# Altium PCB CoreV1.1_test.PcbDoc (part 6 of 14)
Units mil, origin at the board's own origin, x right, y up, seen from the top; angles counter-clockwise.
Board outline 2860 x 2420 mil, 6 copper layers (Top Layer, GND, SIGNAL_1, SIGNAL_2, POWER, Bottom Layer); 110 components, 241 nets, 882 pads, 697 vias.
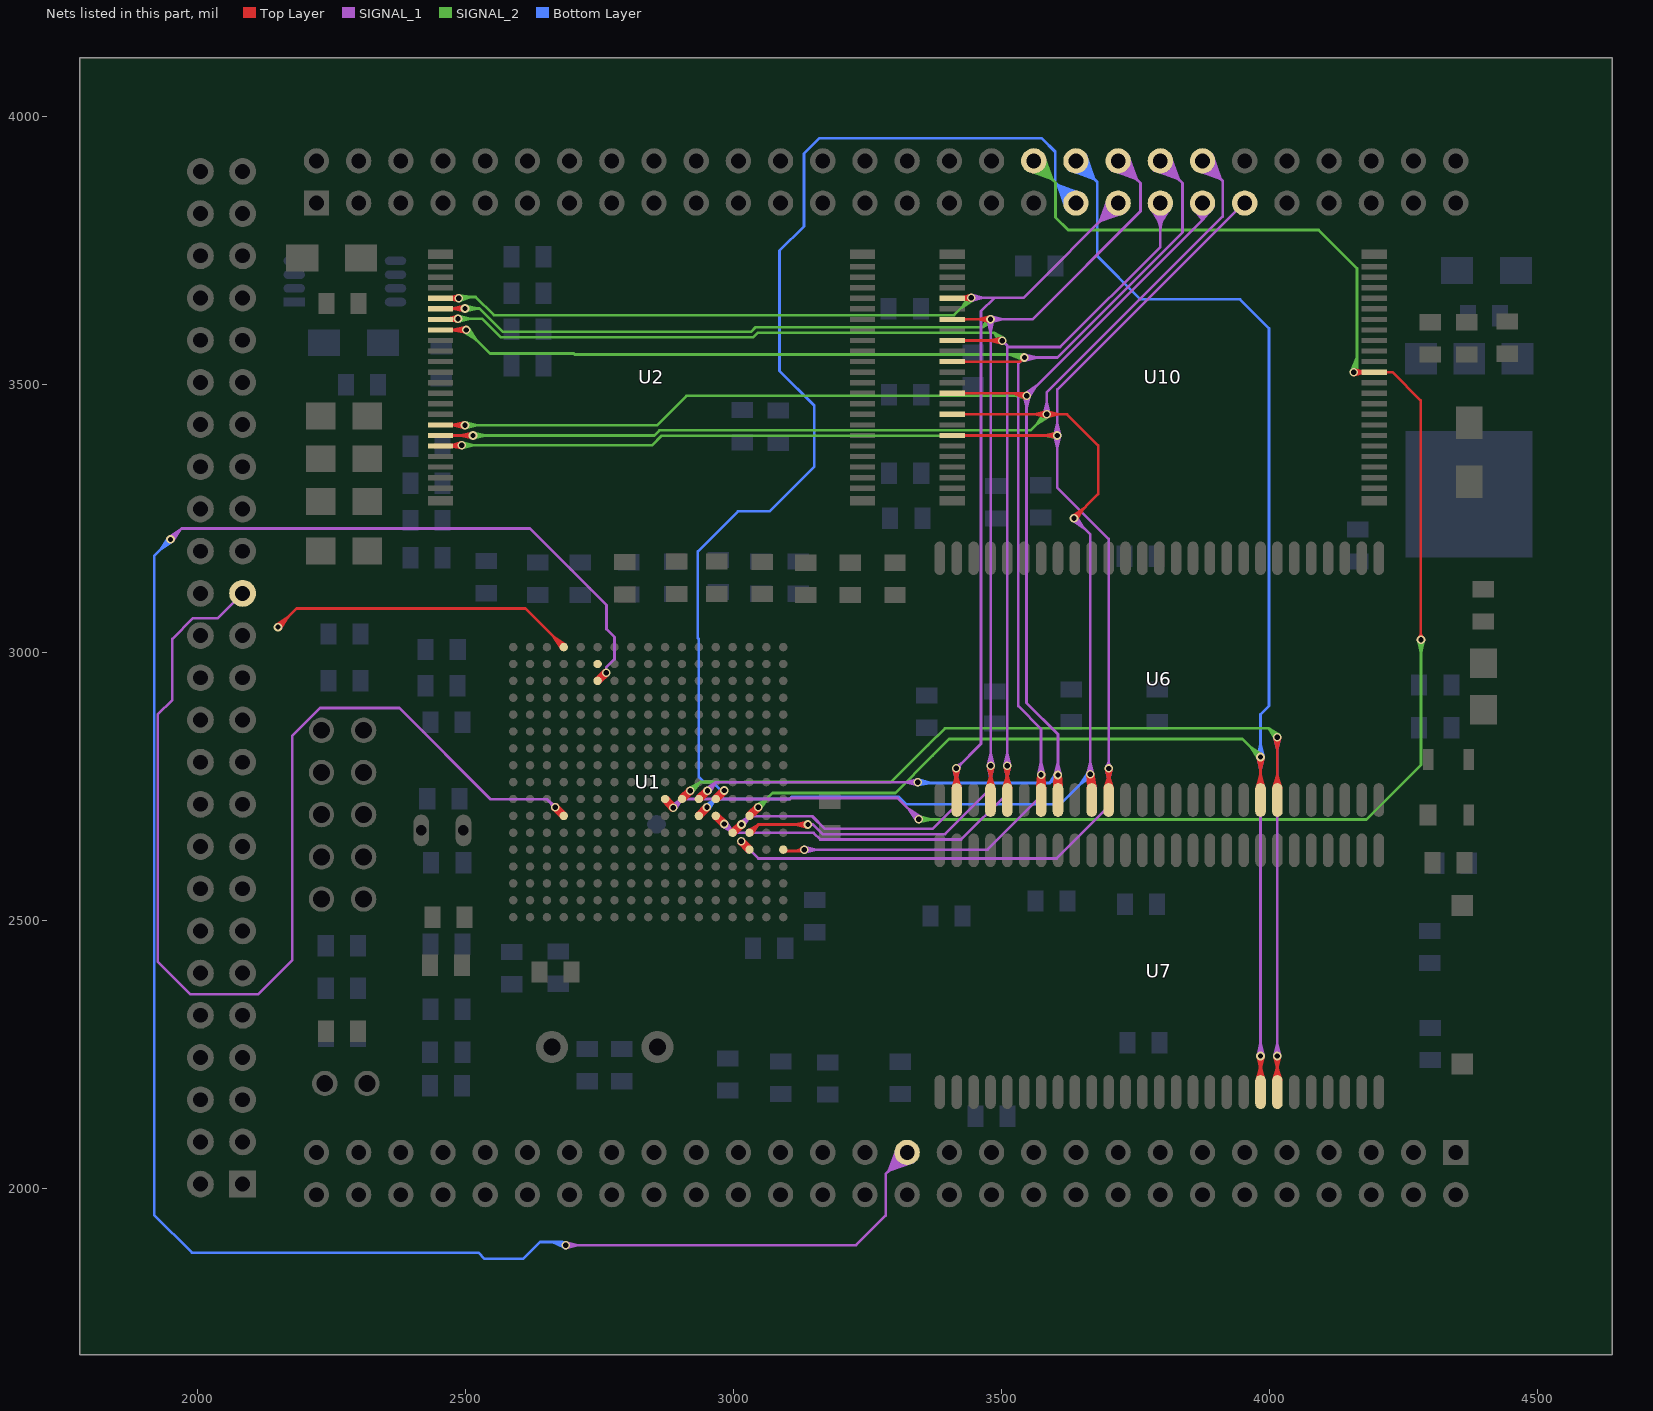
[diagram p10: the nets of this part, all layers, seen from the top]

## Via types
v1: diameter 16, hole 10, Top Layer to Bottom Layer, tented both sides, 637 vias
v2: diameter 30, hole 18, Top Layer to Bottom Layer, tented both sides, 56 vias
v3: diameter 16, hole 10, Top Layer to Bottom Layer, 2 vias
v4: diameter 30, hole 16, Top Layer to Bottom Layer, tented both sides, 1 vias
v5: diameter 16/16/16/16 (per signal layer), hole 10, Top Layer to Bottom Layer, tented both sides, 1 vias

## Nets (pads, with @x,y where several pads share a name; then routed paths per layer and width w, separated by ;. In a path a pad name is that pad's centre, name@x,y a point inside that pad or via, vN(x,y) a via of type N, cw(c..) or ccw(c..) an arc to the next point about the centre after c; other vN are vias at no path point) (continued)
LADDR22: pad.PC36 U1.H10 U10.13 | length 4683
  Top Layer w5: U1.H10@2872.38,2721.26 cw(c2872.38,2708.29) 2881.56,2717.46 cw(c2890.73,2726.64) U1.H10@2877.76,2726.64 ; U1.H10@2877.39,2721.63 cw(c2866.26,2710.5) v1@2882,2710.5 ; 2879.85,2719.17 ccw(c2887.5,2726.82) v1@2887.5,2716 ; v1@2882.41,2708.43 U1.H10@2876.63,2729.93 ; v1@2883.05,2707.27 U1.H10@2872.38,2726.64 ; v1@2883.96,2706.29 U1.H10@2869.09,2722.39 ; v1@2889.88,2715.46 U1.H10@2869.09,2722.39 ; v1@2891.02,2714.73 U1.H10@2872.38,2726.64 ; v1@2891.93,2713.76 U1.H10@2876.63,2729.93 ; v1@4158.45,3517.75 4180.79,3523.21 v1@4158.45,3528.67 ; v1@4158.57,3517.76 U10.13@4177.13,3523.21 ; v1@4158.57,3528.65 U10.13@4177.13,3523.21 ; v1@4161.68,3519.32 cw(c4171.07,3509.93) 4171.07,3523.21 cw(c4171.07,3536.49) v1@4161.68,3527.1 ; U10.13@4175.41,3521.5 ccw(c4171.28,3517.36) 4171.28,3523.21 ccw(c4171.28,3529.05) U10.13@4175.41,3524.92 ; U10.13@4214.53,3523.21 4229.79,3523.21 ; U10.13@4216.24,3521.5 cw(c4220.37,3517.36) 4220.37,3523.21 cw(c4220.37,3529.05) U10.13@4216.24,3524.92 ; v1@4279.11,3027.39 ccw(c4270.93,3035.57) 4282.5,3035.57 ; 4282.5,3037.99 ccw(c4297.49,3037.99) v1@4286.89,3027.39 ; v1(4283,3023.5) 4282.5,3024 4282.5,3470.5 4229.79,3523.21 ; U1.H10@2869.09,2722.39 v1@2887.5,2711.52 ; U1.H10@2869.09,2722.39 v1(2887.5,2710.5) ; U1.H10@2872.38,2726.64 v1@2887.5,2711.52 ; U1.H10@2872.38,2726.64 v1(2887.5,2710.5) ; U1.H10@2876.63,2729.93 v1@2887.5,2711.52 ; U1.H10@2876.63,2729.93 v1(2887.5,2710.5) ; U10.13@4177.13,3523.21 v1(4157.79,3523.21) U10.13@4195.83,3523.21 4229.79,3523.21
  SIGNAL_1 w5: v1@2884.11,2714.83 2903.5,2726.5 ; v1(2887.5,2710.5) 2903.5,2726.5 ; v1@2887.5,2716 ccw(c2887.5,2729.28) 2896.89,2719.89 ccw(c2906.28,2710.5) v1@2893,2710.5 ; v1@2891.83,2707.11 2903.5,2726.5 ; v1@3340.5,2689 ccw(c3327.22,2689) 3336.61,2698.39 ccw(c3346,2707.78) v1@3346,2694.5 ; v1@3341.73,2685.54 3327.39,2707.61 v1@3349.46,2693.27 ; v1(3346,2689) 3306.5,2728.5 3107.08,2728.5 3105.08,2726.5 2903.5,2726.5
  SIGNAL_2 w5: v1@3346.54,2683.53 3369.02,2688.5 ; v1@3346.78,2694.45 3369.02,2688.5 ; v1@3349.89,2685.11 cw(c3358.07,2676.93) 3358.07,2688.5 ; v1@3349.89,2692.89 ccw(c3360.49,2703.49) 3360.49,2688.5 ; pad.PC36@3549.06,3899.61 3594.61,3883.22 ; pad.PC36@3551.04,3904.31 3594.61,3883.22 ; pad.PC36@3553.47,3908.73 3594.61,3883.22 ; pad.PC36@3556.33,3912.85 3594.61,3883.22 ; pad.PC36@3560.38,3896.33 cw(c3560.38,3845.33) 3596.44,3881.39 cw(c3632.49,3917.45) pad.PC36@3581.5,3917.45 ; pad.PC36@3560.38,3901.33 cw(c3560.38,3862.4) 3587.9,3889.93 cw(c3615.42,3917.45) pad.PC36@3576.5,3917.45 ; pad.PC36@3560.38,3906.33 cw(c3560.38,3879.48) 3579.36,3898.46 cw(c3598.35,3917.45) pad.PC36@3571.5,3917.45 ; pad.PC36@3560.38,3917.45 3601,3876.83 3601,3812.23 3624.73,3788.5 4092,3788.5 4163.5,3717 4163.5,3528.92 v1(4157.79,3523.21) 4163.5,3549.85 ; pad.PC36@3564.97,3921.49 3594.61,3883.22 ; pad.PC36@3569.09,3924.36 3594.61,3883.22 ; pad.PC36@3573.52,3926.79 3594.61,3883.22 ; pad.PC36@3578.21,3928.77 3594.61,3883.22 ; v1@4152.56,3524.9 4163.5,3549.85 ; v1@4153.9,3527.1 ccw(c4130.73,3550.27) 4163.5,3550.27 ; v1@4157.44,3523.56 ccw(c4142.8,3538.2) 4163.5,3538.2 ; v1@4163.26,3522.6 4163.5,3549.85 ; v1@4277.54,3022.84 4283,3000.5 v1@4288.46,3022.84 ; v1@4279.11,3019.61 cw(c4269.72,3010.22) 4283,3010.22 cw(c4296.28,3010.22) v1@4286.89,3019.61 ; v1(4283,3023.5) 4283,2790.5 4181,2688.5 3346.5,2688.5 v1(3346,2689) 3369.02,2688.5
LADDR23: pad.PC37 U1.E10 | length 2926.5
  Top Layer w5: U1.E10@2966.87,2732.01 ccw(c2966.87,2744.99) 2976.04,2735.81 ccw(c2985.22,2726.64) U1.E10@2972.24,2726.64 ; 2973.15,2732.92 cw(c2983,2723.07) v1@2983,2737 ; 2973.8,2733.57 ccw(c2964.87,2742.5) v1@2977.5,2742.5 ; v1@2978.01,2744.81 U1.E10@2971.1,2723.32 ; v1@2978.7,2745.92 U1.E10@2966.87,2726.64 ; v1@2979.62,2746.84 U1.E10@2963.55,2730.87 ; v1@2985.23,2737.47 U1.E10@2963.55,2730.87 ; v1@2986.35,2738.14 U1.E10@2966.87,2726.64 ; v1@2987.29,2739.05 U1.E10@2971.1,2723.32 ; U1.E10@2963.55,2730.87 v1@2982.73,2742.5 ; U1.E10@2963.55,2730.87 v1(2983,2742.5) ; U1.E10@2966.87,2726.64 v1@2982.73,2742.5 ; U1.E10@2966.87,2726.64 v1(2983,2742.5) ; U1.E10@2971.1,2723.32 v1@2982.73,2742.5 ; U1.E10@2971.1,2723.32 v1(2983,2742.5)
  Bottom Layer w5: v1(2983,2742.5) 2976.5,2742.5 2960.74,2758.26 2944.58,2758.26 2935.5,2767.34 2935.5,2830.58 2935.25,2830.83 2935.25,3025.01 2933.5,3026.76 2933.5,3188.5 3008.5,3263.5 3067,3263.5 3151,3347.5 3151,3460.5 3086,3525.5 3086,3749.86 3131.5,3795.36 3131.5,3931 3160,3959.5 3575.5,3959.5 3600.5,3934.5 3600.5,3877.33 pad.PC37@3639.12,3838.71 3604.89,3872.94 ; pad.PC37@3618,3838.71 ccw(c3567,3838.71) 3603.06,3874.77 ccw(c3639.12,3910.82) pad.PC37@3639.12,3859.83 ; pad.PC37@3621.28,3827.39 3604.89,3872.94 ; pad.PC37@3623,3838.71 ccw(c3584.07,3838.71) 3611.6,3866.23 ccw(c3639.12,3893.75) pad.PC37@3639.12,3854.83 ; pad.PC37@3625.98,3829.37 3604.89,3872.94 ; pad.PC37@3628,3838.71 ccw(c3601.15,3838.71) 3620.13,3857.69 ccw(c3639.12,3876.68) pad.PC37@3639.12,3849.83 ; pad.PC37@3630.4,3831.8 3604.89,3872.94 ; pad.PC37@3634.52,3834.66 3604.89,3872.94 ; pad.PC37@3643.16,3843.3 3604.89,3872.94 ; pad.PC37@3646.03,3847.42 3604.89,3872.94 ; pad.PC37@3648.46,3851.85 3604.89,3872.94 ; pad.PC37@3650.44,3856.54 3604.89,3872.94
LADDR24: pad.PC38 U1.C11 U6.20 U7.20 | length 4786.6
  Top Layer w5: U1.C11@3029.86,2700.52 ccw(c3029.86,2713.49) 3039.04,2704.32 ccw(c3048.21,2695.14) U1.C11@3035.24,2695.14 ; U1.C11@3030.14,2695.14 U1.C11@3029.86,2695.14 ; 3036.13,2701.41 cw(c3046,2691.55) v1@3046,2705.5 ; 3036.81,2702.09 ccw(c3027.9,2711) v1@3040.5,2711 ; v1@3041.01,2713.31 U1.C11@3034.09,2691.82 ; v1@3041.7,2714.43 U1.C11@3029.86,2695.14 ; v1@3042.63,2715.34 U1.C11@3026.54,2699.37 ; v1@3048.23,2705.97 U1.C11@3026.54,2699.37 ; v1@3049.35,2706.64 U1.C11@3029.86,2695.14 ; v1@3050.28,2707.55 U1.C11@3034.09,2691.82 ; U7.20@3976.29,2202.47 3983.55,2226.23 ; U6.20@3976.29,2747.47 3983.55,2771.23 ; v1@3978.09,2246.34 3983.55,2224 v1@3989.01,2246.34 ; v1@3978.09,2804.34 3983.55,2782 v1@3989.01,2804.34 ; U7.20@3978.36,2206.58 ccw(c3965.83,2219.11) 3983.55,2219.11 ccw(c4001.28,2219.11) U7.20@3988.74,2206.58 ; U6.20@3978.36,2751.58 ccw(c3965.83,2764.11) 3983.55,2764.11 ccw(c4001.28,2764.11) U6.20@3988.74,2751.58 ; v1@3979.66,2243.11 cw(c3970.27,2233.72) 3983.55,2233.72 cw(c3996.83,2233.72) v1@3987.44,2243.11 ; v1@3979.66,2801.11 cw(c3970.27,2791.72) 3983.55,2791.72 cw(c3996.83,2791.72) v1@3987.44,2801.11 ; U7.20@3983.55,2179.73 v1(3983.55,2247) ; U7.20@3983.55,2201.39 3983.55,2226.23 ; U6.20@3983.55,2724.73 v1(3983.55,2805) ; U6.20@3983.55,2746.39 3983.55,2771.23 ; U7.20@3990.81,2202.47 3983.55,2226.23 ; U6.20@3990.81,2747.47 3983.55,2771.23 ; U1.C11@3026.54,2699.37 v1@3045.72,2711 ; U1.C11@3026.54,2699.37 v1(3046,2711) ; U1.C11@3029.86,2695.14 v1@3045.72,2711 ; U1.C11@3029.86,2695.14 v1(3046,2711) ; U1.C11@3034.09,2691.82 v1@3045.72,2711 ; U1.C11@3034.09,2691.82 v1(3046,2711)
  SIGNAL_1 w5: v1@3978.09,2247.65 3983.5,2270 ; v1@3978.09,2804.35 3983.5,2782 ; v1@3979.66,2250.89 ccw(c3970.4,2260.15) 3983.5,2260.15 ; v1@3979.66,2801.11 cw(c3970.4,2791.85) 3983.5,2791.85 ; v1@3983.5,2247.05 v1@3983.5,2805 ; 3983.5,2260.4 ccw(c3996.96,2260.4) v1@3987.44,2250.89 ; 3983.5,2791.6 cw(c3996.96,2791.6) v1@3987.44,2801.11 ; v1(3983.55,2247) 3983.5,2270 ; v1(3983.55,2805) 3983.5,2782 ; v1@3989.01,2247.67 3983.5,2270 ; v1@3989.01,2804.33 3983.5,2782
  SIGNAL_2 w5: v1@3042.56,2715.29 3064.68,2729.47 ; v1@3046,2716.5 ccw(c3046,2730.3) 3055.76,2720.54 ; v1@3050.25,2707.51 3064.68,2729.47 ; v1@3051.5,2711 cw(c3064.26,2711) 3055.24,2720.02 ; 3371.58,2807.5 3302.08,2738 3073.22,2738 3046.22,2711 v1(3046,2711) 3064.68,2729.47 ; 3371.64,2807.5 3402.64,2838.5 3950.05,2838.5 v1(3983.55,2805) 3964.95,2823.61 ; v1@3978.05,2805 ccw(c3964.77,2805) 3974.16,2814.39 ccw(c3983.55,2823.78) v1@3983.55,2810.5 ; v1@3979.28,2801.54 3964.95,2823.61 ; v1@3987.01,2809.27 3964.95,2823.61
  Bottom Layer w5: pad.PC38@3627.8,3899.61 3673.35,3883.22 ; pad.PC38@3629.78,3904.31 3673.35,3883.22 ; pad.PC38@3632.21,3908.73 3673.35,3883.22 ; pad.PC38@3635.07,3912.85 3673.35,3883.22 ; pad.PC38@3639.12,3896.33 cw(c3639.12,3845.33) 3675.18,3881.39 cw(c3711.23,3917.45) pad.PC38@3660.24,3917.45 ; pad.PC38@3639.12,3901.33 cw(c3639.12,3862.4) 3666.64,3889.93 cw(c3694.16,3917.45) pad.PC38@3655.24,3917.45 ; pad.PC38@3639.12,3906.33 cw(c3639.12,3879.48) 3658.1,3898.46 cw(c3677.09,3917.45) pad.PC38@3650.24,3917.45 ; pad.PC38@3639.12,3917.45 3679,3877.57 3679,3739.5 3759.48,3659.02 3945.48,3659.02 3999.5,3605 3999.5,2900.56 3983.5,2884.56 3983.5,2847 ; pad.PC38@3643.71,3921.49 3673.35,3883.22 ; pad.PC38@3647.83,3924.36 3673.35,3883.22 ; pad.PC38@3652.26,3926.79 3673.35,3883.22 ; pad.PC38@3656.95,3928.77 3673.35,3883.22 ; v1@3978.09,2805.65 3983.5,2828 ; v1@3979.66,2808.89 ccw(c3970.4,2818.15) 3983.5,2818.15 ; 3983.5,2818.4 ccw(c3996.96,2818.4) v1@3987.44,2808.89 ; 3983.5,2838 3983.5,2847 ; v1@3989.01,2805.67 3983.5,2828 ; 3983.5,2828 v1(3983.55,2805) 3983.5,2805.05 3983.5,2847
LADDR25: U1.G10 U6.21 U7.21 | length 2891.1
  Top Layer w5: U1.G10@2903.88,2732.01 ccw(c2903.88,2744.99) 2913.05,2735.81 ccw(c2922.23,2726.64) U1.G10@2909.25,2726.64 ; v1@2913.74,2742 cw(c2900.46,2742) 2909.85,2732.61 cw(c2919.24,2723.22) v1@2919.24,2736.5 ; v1@2914.2,2744.19 U1.G10@2908.12,2723.34 ; v1@2914.89,2745.37 U1.G10@2903.88,2726.64 ; v1@2915.85,2746.33 U1.G10@2900.58,2730.88 ; v1@2921.43,2736.96 U1.G10@2900.58,2730.88 ; v1@2922.61,2737.65 U1.G10@2903.88,2726.64 ; v1@2923.57,2738.61 U1.G10@2908.12,2723.34 ; U7.21@4007.79,2202.47 4015.05,2226.23 ; U6.21@4007.79,2747.47 4015.05,2771.23 ; v1@4009.59,2246.34 4015.05,2224 v1@4020.51,2246.34 ; v1@4009.59,2841.34 4015.05,2819 v1@4020.51,2841.34 ; U7.21@4009.86,2206.58 ccw(c3997.32,2219.11) 4015.05,2219.11 ccw(c4032.77,2219.11) U7.21@4020.24,2206.58 ; U6.21@4009.86,2751.58 ccw(c3997.32,2764.11) 4015.05,2764.11 ccw(c4032.77,2764.11) U6.21@4020.24,2751.58 ; v1@4011.16,2243.11 cw(c4001.77,2233.72) 4015.05,2233.72 cw(c4028.33,2233.72) v1@4018.94,2243.11 ; v1@4011.16,2838.11 cw(c4001.77,2828.72) 4015.05,2828.72 cw(c4028.33,2828.72) v1@4018.94,2838.11 ; U7.21@4015.05,2179.73 v1(4015.05,2247) ; U7.21@4015.05,2201.39 4015.05,2226.23 ; U6.21@4015.05,2724.73 v1(4015.05,2842) ; U6.21@4015.05,2746.39 4015.05,2771.23 ; U7.21@4022.31,2202.47 4015.05,2226.23 ; U6.21@4022.31,2747.47 4015.05,2771.23 ; U1.G10@2900.58,2730.88 v1(2919.24,2742) ; U1.G10@2900.58,2730.88 v1(2919.24,2742) ; U1.G10@2903.88,2726.64 v1(2919.24,2742) ; U1.G10@2903.88,2726.64 v1(2919.24,2742) ; U1.G10@2908.12,2723.34 v1(2919.24,2742) ; U1.G10@2908.12,2723.34 v1(2919.24,2742)
  SIGNAL_1 w5: v1@4009.59,2247.66 4015.05,2270 v1@4020.51,2247.66 ; v1@4009.59,2841.34 4015.05,2819 v1@4020.51,2841.34 ; v1@4011.16,2250.89 ccw(c4001.77,2260.28) 4015.05,2260.28 ccw(c4028.33,2260.28) v1@4018.94,2250.89 ; v1@4011.16,2838.11 cw(c4001.77,2828.72) 4015.05,2828.72 cw(c4028.33,2828.72) v1@4018.94,2838.11 ; v1(4015.05,2247) v1(4015.05,2842)
  SIGNAL_2 w5: v1@2916.12,2746.53 2938,2758.26 ; v1@2919.24,2747.5 ccw(c2919.24,2766.8) 2932.89,2753.15 ; v1@2923.28,2738.27 2938,2758.26 ; v1@2924.74,2742 cw(c2931.99,2742) 2926.86,2747.13 ; v1@4009.55,2842 ccw(c3996.27,2842) 4005.66,2851.39 ccw(c4015.05,2860.78) v1@4015.05,2847.5 ; v1@4010.73,2838.6 3998.55,2858.5 ; v1@4018.45,2846.32 3998.55,2858.5 ; 2938,2758.26 2957.42,2758.26 2957.66,2758.5 2989.42,2758.5 2989.91,2758.01 3020.16,2758.01 3020.43,2758.28 3294.07,2758.28 3363.3,2827.5 3363.35,2827.5 3394.35,2858.5 3998.55,2858.5 ; 2938,2758.26 2921.74,2742 v1(2919.24,2742) 2938,2758.26 ; 3998.55,2858.5 v1(4015.05,2842) 3998.55,2858.5
LCD_PWR: pad.PB29 U1.P11 | length 2511.8
  Top Layer w5: v1@2663.19,2707.59 U1.P11@2679.18,2691.82 ; v1@2665.25,2705.98 U1.P11@2686.72,2699.37 ; v1@2667.5,2705.5 cw(c2667.5,2692.11) 2676.97,2701.58 ; v1@2670.9,2715.32 U1.P11@2686.72,2699.37 ; v1@2672.51,2713.26 U1.P11@2679.18,2691.82 ; v1@2673,2711 ccw(c2686.16,2711) 2676.86,2701.69 ; U1.P11@2678.03,2695.14 ccw(c2665.06,2695.14) 2674.23,2704.32 ccw(c2683.41,2713.49) U1.P11@2683.41,2700.52 ; v1(2667.5,2711) U1.P11@2683.41,2695.14 ; v1(2667.5,2711) U1.P11@2679.18,2691.82 ; v1(2667.5,2711) U1.P11@2686.72,2699.37 ; v1(2667.5,2711) U1.P11@2683.41,2695.14 ; v1(2667.5,2711) U1.P11@2683.41,2695.14 ; v1(2667.5,2711) U1.P11@2679.18,2691.82 ; v1(2667.5,2711) U1.P11@2686.72,2699.37 ; v1(2667.5,2711) U1.P11@2683.41,2695.14 ; U1.P11@2683.41,2695.14 2671.83,2714.39 U1.P11@2683.41,2695.14 ; U1.P11@2683.41,2695.14 2664.12,2706.66 U1.P11@2683.41,2695.14
  SIGNAL_1 w5: pad.PB29@2084,3110.36 2037.76,3064.12 1991.8,3064.12 1952.76,3025.08 1952.76,2911.76 1925.5,2884.5 1925.5,2423.5 1987,2362 2113,2362 2176.5,2425.5 2176.5,2844.27 2228.73,2896.5 2376.56,2896.5 2547.05,2726.02 2652.48,2726.02 v1(2667.5,2711) ; v1@2662,2711 ccw(c2648.72,2711) 2658.11,2720.39 ccw(c2667.5,2729.78) v1@2667.5,2716.5
LCDVF0: pad.PA27 U1.M3 | length 5201.5
  Top Layer w5: U1.M3@2746.4,2952.48 ccw(c2746.4,2967.18) 2756.79,2956.79 ; U1.M3@2751.77,2947.11 cw(c2763.03,2947.11) 2755.07,2955.07 ; v1@2757.02,2962.52 cw(c2743.74,2962.52) 2753.13,2953.13 cw(c2762.52,2943.74) v1@2762.52,2957.02 ; v1@2757.55,2964.88 U1.M3@2750.55,2943.7 ; v1@2758.17,2965.89 U1.M3@2747.11,2947.11 ; v1@2758.26,2966 U1.M3@2746.4,2947.11 ; v1@2759.21,2966.92 U1.M3@2743.18,2951.41 ; v1@2764.65,2957.45 U1.M3@2743.18,2951.41 ; v1@2765.8,2958.11 U1.M3@2746.4,2947.11 ; v1@2765.89,2958.17 U1.M3@2747.11,2947.11 ; v1@2766.76,2959.02 U1.M3@2750.55,2943.7 ; U1.M3@2743.18,2951.41 v1(2762.52,2962.52) ; U1.M3@2743.18,2951.41 v1(2762.52,2962.52) ; U1.M3@2746.4,2947.11 U1.M3@2747.11,2947.11 ; U1.M3@2746.4,2947.11 v1(2762.52,2962.52) ; U1.M3@2746.4,2947.11 v1(2762.52,2962.52) ; U1.M3@2747.11,2947.11 v1(2762.52,2962.52) ; U1.M3@2747.11,2947.11 v1(2762.52,2962.52) ; U1.M3@2750.55,2943.7 v1(2762.52,2962.52) ; U1.M3@2750.55,2943.7 v1(2762.52,2962.52)
  SIGNAL_1 w5: v1@1946.04,3215.27 1968.11,3229.61 v1@1953.77,3207.54 ; v1(1949.5,3211) 1970.1,3231.6 2081,3231.6 ; v1@1949.5,3216.5 ccw(c1949.5,3229.78) 1958.89,3220.39 ccw(c1968.28,3211) v1@1955,3211 ; 2076.26,3231.6 2081,3231.6 ; v1@2687.66,1888.54 2710,1894 ; v1@2687.66,1899.46 2710,1894 ; v1@2690.89,1890.11 cw(c2700.28,1880.72) 2700.28,1894 cw(c2700.28,1907.28) v1@2690.89,1897.89 ; v1(2762.52,2962.52) 2762.52,2972.1 2778,2987.58 2778,3028.65 2763,3043.65 2763,3088.64 2620.04,3231.6 2081,3231.6 ; pad.PA27@3303.04,2067.06 cw(c3252.04,2067.06) 3288.1,2031 cw(c3324.16,1994.94) pad.PA27@3324.16,2045.93 ; pad.PA27@3306.32,2078.37 3289.93,2032.83 ; pad.PA27@3308.04,2067.06 cw(c3269.11,2067.06) 3296.64,2039.53 cw(c3324.16,2012.01) pad.PA27@3324.16,2050.93 ; pad.PA27@3311.02,2076.4 3289.93,2032.83 ; pad.PA27@3313.04,2067.06 cw(c3286.19,2067.06) 3305.17,2048.07 cw(c3324.16,2029.08) pad.PA27@3324.16,2055.93 ; pad.PA27@3315.44,2073.97 3289.93,2032.83 ; pad.PA27@3319.56,2071.1 3289.93,2032.83 ; pad.PA27@3324.16,2067.06 3284,2026.9 3284,1949.39 3228.61,1894 v1@2689,1894 ; pad.PA27@3328.2,2062.46 3289.93,2032.83 ; pad.PA27@3331.07,2058.34 3289.93,2032.83 ; pad.PA27@3333.5,2053.92 3289.93,2032.83 ; pad.PA27@3335.48,2049.22 3289.93,2032.83 ; v1(2687,1894) v1@2689,1894 ; v1(2687,1894) 2688,1893 v1@2689,1894 ; v1(2687,1894) 2710,1894
  Bottom Layer w5: v1@1944,3211 cw(c1930.72,3211) 1940.11,3201.61 cw(c1949.5,3192.22) v1@1949.5,3205.5 ; v1@1945.23,3214.46 1930.89,3192.39 v1@1952.96,3206.73 ; v1(1949.5,3211) 1919,3180.5 1919,1950.29 1989.29,1880 2524,1880 2535.5,1868.5 2607.42,1868.5 2638.92,1900 2681,1900 v1(2687,1894) 2660.61,1900 ; 2659.24,1900 cw(c2659.24,1866.24) v1@2683.11,1890.11 ; 2671.31,1900 cw(c2671.31,1878.31) v1@2686.65,1893.65 ; v1@2685.24,1888.79 2660.61,1900 ; v1@2687.67,1899.46 2660.61,1900
LCDVF1: U1.M2
LCDVF2: U1.P1 | length 749.8
  Top Layer w5: v3@2146.54,3051.77 2168.61,3066.11 v3@2154.27,3044.04 ; v3(2150,3047.5) 2184.5,3082 2611.5,3082 U1.P1@2683.41,3010.1 2664.93,3028.58 ; v3@2150,3053 ccw(c2150,3066.28) 2159.39,3056.89 ccw(c2168.78,3047.5) v3@2155.5,3047.5 ; U1.P1@2678.03,3010.1 ccw(c2665.06,3010.1) 2674.23,3019.28 ccw(c2683.41,3028.45) U1.P1@2683.41,3015.48 ; U1.P1@2679.24,3006.71 2664.93,3028.58 ; U1.P1@2686.8,3014.27 2664.93,3028.58
LDATA0: pad.PC39 U1.D12 U2.29 U6.2 U10.29 | length 4767.6
  Top Layer w5: U2.29@2453.42,3661 v1(2487.5,3661) ; U2.29@2473.84,3659.29 cw(c2477.96,3655.17) 2477.96,3661 ; U2.29@2473.84,3662.72 ccw(c2477.98,3666.86) 2477.98,3661 ; v1@2483.61,3657.11 ccw(c2474.22,3647.72) 2474.22,3661 ccw(c2474.22,3674.28) v1@2483.61,3664.89 ; v1@2486.51,3655.59 U2.29@2472.12,3661 ; v1@2486.52,3666.41 U2.29@2472.12,3661 ; v1@2486.84,3655.54 U2.29@2464.5,3661 ; v1@2486.84,3666.46 U2.29@2464.5,3661 ; U1.D12@2998.37,2669.02 ccw(c2998.37,2681.99) 3007.54,2672.82 ccw(c3016.71,2663.65) U1.D12@3003.74,2663.65 ; U1.D12@3003.43,2668.71 cw(c3015,2657.13) v1@3015,2673.5 ; 3006.52,2671.8 ccw(c2999.31,2679) v1@3009.5,2679 ; v1@3010.08,2681.46 U1.D12@3002.61,2660.35 ; v1@3010.81,2682.56 U1.D12@2998.37,2663.65 ; v1@3011.76,2683.45 U1.D12@2995.07,2667.89 ; v1@3017.08,2673.91 U1.D12@2995.07,2667.89 ; v1@3018.21,2674.54 U1.D12@2998.37,2663.65 ; v1@3019.17,2675.42 U1.D12@3002.61,2660.35 ; U10.29@3408.42,3661 3443.09,3661 U10.29@3427.12,3661 ; U6.2@3409.34,2747.29 3416,2771.23 ; v1@3410.54,2783.13 3416,2760.79 ; U6.2@3411.43,2751.58 ccw(c3400.4,2762.61) 3416,2762.61 ; v1@3412.11,2779.9 cw(c3402.72,2770.51) 3416,2770.51 cw(c3429.28,2770.51) v1@3419.89,2779.9 ; 3416,2765.61 ccw(c3435.85,2765.61) U6.2@3421.81,2751.58 ; U6.2@3416.62,2724.73 3416,2725.35 v1(3416,2783.79) 3416,2760.79 ; U6.2@3416.62,2746.39 3416,2771.23 ; v1@3421.46,2783.13 3416,2760.79 ; U6.2@3423.85,2747.65 3416,2771.23 ; U10.29@3428.49,3661 ccw(c3428.49,3677.46) v1@3440.13,3665.82 ; U10.29@3428.84,3659.29 cw(c3432.97,3655.16) 3432.97,3661 cw(c3432.97,3666.85) U10.29@3428.84,3662.72 ; 3432.98,3661 cw(c3432.98,3650.9) v1@3440.13,3658.05 ; v1@3442.82,3667.3 U10.29@3427.12,3661 ; v1@3443.14,3667.36 U10.29@3420.98,3661 ; v1@3443.42,3656.47 U10.29@3427.12,3661 ; v1@3443.58,3656.45 U10.29@3420.98,3661 ; U2.29@2464.5,3661 v1(2487.5,3661) ; U2.29@2472.12,3661 v1(2487.5,3661) ; U2.29@2472.12,3661 v1(2487.5,3661) ; U1.D12@2995.07,2667.89 v1@3013.72,2679 ; U1.D12@2995.07,2667.89 v1(3015,2679) ; U1.D12@2998.37,2663.65 v1@3013.72,2679 ; U1.D12@2998.37,2663.65 v1(3015,2679) ; U1.D12@3002.61,2660.35 v1@3013.72,2679 ; U1.D12@3002.61,2660.35 v1(3015,2679) ; U10.29@3420.98,3661 v1(3444.02,3661.93) U10.29@3427.12,3661
  SIGNAL_1 w5: v1@3011.63,2683.35 3030.5,2694.5 ; v1(3015,2679) 3030.5,2694.5 ; v1@3015,2684.5 ccw(c3015,2697.78) 3024.39,2688.39 ccw(c3033.78,2679) v1@3020.5,2679 ; v1@3019.35,2675.63 3030.5,2694.5 ; v1@3410.54,2783.13 3416,2760.79 ; v1@3412.11,2779.9 cw(c3402.72,2770.51) 3416,2770.51 cw(c3429.28,2770.51) v1@3419.89,2779.9 ; v1@3416,2789.29 ccw(c3416,2802.57) 3425.39,2793.18 ccw(c3434.78,2783.79) v1@3421.5,2783.79 ; v1@3421.46,2783.13 3416,2760.79 ; v1(3444.02,3661.93) 3467.02,3661.93 ; v1@3444.67,3656.47 3467.02,3661.93 ; v1@3444.67,3667.4 3467.02,3661.93 ; v1@3447,3661.93 3486.93,3661.93 ; v1@3447.9,3658.05 cw(c3457.29,3648.66) 3457.29,3661.93 cw(c3457.29,3675.21) v1@3447.9,3665.82 ; 3502.5,3661.93 3541.08,3661.93 pad.PC39@3717.86,3838.71 3683.63,3804.48 ; 3502.5,3662 3487,3662 3486.93,3661.93 ; pad.PC39@3696.74,3838.71 cw(c3645.74,3838.71) 3681.8,3802.65 cw(c3717.86,3766.59) pad.PC39@3717.86,3817.59 ; pad.PC39@3700.02,3850.03 3683.63,3804.48 ; pad.PC39@3701.74,3838.71 cw(c3662.81,3838.71) 3690.34,3811.19 cw(c3717.86,3783.66) pad.PC39@3717.86,3822.59 ; pad.PC39@3704.72,3848.05 3683.63,3804.48 ; pad.PC39@3706.74,3838.71 cw(c3679.89,3838.71) 3698.87,3819.72 cw(c3717.86,3800.74) pad.PC39@3717.86,3827.59 ; pad.PC39@3709.14,3845.62 3683.63,3804.48 ; pad.PC39@3713.26,3842.75 3683.63,3804.48 ; pad.PC39@3721.9,3834.11 3683.63,3804.48 ; pad.PC39@3724.77,3829.99 3683.63,3804.48 ; pad.PC39@3727.2,3825.57 3683.63,3804.48 ; pad.PC39@3729.18,3820.87 3683.63,3804.48 ; 3030.5,2694.5 3147,2694.5 3170.5,2671 3371.5,2671 3416,2715.5 v1(3416,2783.79) ; 3416,2760.79 v1(3416,2783.79) ; v1(3416,2783.79) 3462,2829.79 3462,3637 3486.93,3661.93
  SIGNAL_2 w5: v1(2487.5,3661) 2510.71,3663.5 ; v1@2487.5,3663.5 2518.78,3663.5 2552.78,3629.5 3411.58,3629.5 v1(3444.02,3661.93) 3425.41,3643.33 ; v1@2487.56,3666.5 2510.71,3663.5 ; v1@2488.73,3655.64 2510.71,3663.5 ; v1@2491.39,3657.11 cw(c2506.81,3641.69) 2506.81,3663.5 ; v1@3438.52,3661.93 cw(c3425.24,3661.93) 3434.63,3652.55 cw(c3444.02,3643.16) v1@3444.02,3656.43 ; v1@3439.74,3665.4 3425.41,3643.33 ; v1@3447.48,3657.66 3425.41,3643.33
LDATA1: pad.PC40 U1.C12 U2.30 U6.4 U10.31 | length 4714.5
  Top Layer w5: U2.30@2453.42,3641.32 2454.11,3642 v1(2499,3642) ; U2.30@2472.12,3641.32 v1@2492.05,3642 ; U2.30@2473.84,3639.61 cw(c2479.62,3633.83) 2479.62,3642 ; v1@2495.11,3638.11 ccw(c2485.72,3628.72) 2485.72,3642 ccw(c2485.72,3655.28) v1@2495.11,3645.89 ; v1@2498.21,3647.44 U2.30@2475.99,3641.45 ; v1@2498.34,3636.54 U2.30@2476,3642 ; v1@2498.34,3647.46 U2.30@2476,3642 ; v1@2498.47,3636.53 U2.30@2475.99,3641.45 ; U1.C12@3026.65,2667.95 3045.98,2679.02 ; U1.C12@3029.86,2663.86 U1.C12@3029.86,2663.65 ; U1.C12@3029.86,2669.02 ccw(c3029.86,2683.8) 3040.31,2673.35 ; U1.C12@3034.01,2660.23 3045.98,2679.02 ; U1.C12@3035.24,2663.65 cw(c3046.4,2663.65) 3038.51,2671.54 ; 3125.67,2679.02 cw(c3125.67,2665.67) v1@3135.11,2675.11 ; 3125.77,2679.02 ccw(c3125.77,2692.23) v1@3135.11,2682.89 ; v1@3138.34,2673.54 3116,2679.02 ; v1@3138.35,2684.46 3116,2679.02 ; U10.31@3409.56,3620.5 3410.69,3621.63 v1(3479.63,3621.63) ; U10.31@3427.12,3621.63 3447.05,3621.63 ; U10.31@3428.84,3619.92 cw(c3432.97,3615.79) 3432.97,3621.63 cw(c3432.97,3627.48) U10.31@3428.84,3623.35 ; U6.4@3472.37,2747.58 3480,2771.23 ; U6.4@3474.42,2751.58 ccw(c3460.96,2765.04) 3480,2765.04 ; v1@3474.54,2788.34 3480,2766 ; v1@3475.74,3617.74 ccw(c3466.36,3608.36) 3466.36,3621.63 ccw(c3466.36,3634.91) v1@3475.74,3625.52 ; v1@3476.11,2785.11 cw(c3466.72,2775.72) 3480,2775.72 cw(c3493.28,2775.72) v1@3483.89,2785.11 ; v1@3478.98,3616.17 3456.63,3621.63 v1@3478.98,3627.09 ; U6.4@3479.61,2724.73 3480,2725.12 v1(3480,2789) 3480,2766 ; U6.4@3479.61,2746.39 3480,2771.23 ; 3480,2763.18 ccw(c3496.41,2763.18) U6.4@3484.81,2751.58 ; v1@3485.46,2788.34 3480,2766 ; U6.4@3486.89,2747.36 3480,2771.23 ; U2.30@2475.99,3641.45 v1(2499,3642) ; U2.30@2476,3642 v1(2499,3642) ; U1.C12@3029.86,2663.65 3030.61,2663.65 3045.98,2679.02 ; U1.C12@3029.86,2663.65 3045.98,2679.02 ; 3045.98,2679.02 v1(3139,2679) 3116,2679.02
  SIGNAL_1 w5: v1(3139,2679) 3148.36,2679 3166.36,2661 3394.64,2661 3479.61,2745.97 v1@3479.61,2788.61 ; v1@3474.17,3620.98 3479.63,3598.63 ; v1@3474.53,2788.43 3479.61,2765.99 ; v1@3474.54,2789.66 3480,2812 v1@3485.46,2789.66 ; v1@3475.74,3617.74 cw(c3466.36,3608.36) 3479.63,3608.36 cw(c3492.91,3608.36) 3483.52,3617.74 cw(c3492.91,3608.36) 3492.91,3621.63 cw(c3492.91,3634.91) v1@3483.52,3625.52 ; v1@3476.11,2785.11 cw(c3467.65,2776.65) 3479.61,2776.65 ; v1@3476.11,2792.89 ccw(c3466.72,2802.28) 3480,2802.28 ccw(c3493.28,2802.28) v1@3483.89,2792.89 ; 3479.61,2774.79 cw(c3494.21,2774.79) v1@3483.89,2785.11 ; 3479.63,3597.37 v1@3479.63,3614 ; 3480,3597 v1(3480,2789) 3479.61,2765.99 ; v1@3480.29,3616.17 3502.63,3621.63 v1@3480.29,3627.09 ; v1@3485.09,3620.98 3479.63,3598.63 ; v1@3485.45,2788.25 3479.61,2765.99 ; pad.PC40@3706.54,3899.61 3752.09,3883.22 ; pad.PC40@3708.52,3904.31 3752.09,3883.22 ; pad.PC40@3710.95,3908.73 3752.09,3883.22 ; pad.PC40@3713.81,3912.85 3752.09,3883.22 ; pad.PC40@3717.86,3896.33 cw(c3717.86,3845.33) 3753.92,3881.39 cw(c3789.97,3917.45) pad.PC40@3738.98,3917.45 ; pad.PC40@3717.86,3901.33 cw(c3717.86,3862.4) 3745.38,3889.93 cw(c3772.9,3917.45) pad.PC40@3733.98,3917.45 ; pad.PC40@3717.86,3906.33 cw(c3717.86,3879.48) 3736.84,3898.46 cw(c3755.83,3917.45) pad.PC40@3728.98,3917.45 ; pad.PC40@3717.86,3917.45 3759.5,3875.81 3759.5,3823.5 3557.63,3621.63 v1(3479.63,3621.63) 3479.63,3598.63 ; pad.PC40@3722.45,3921.49 3752.09,3883.22 ; pad.PC40@3726.57,3924.36 3752.09,3883.22 ; pad.PC40@3731,3926.79 3752.09,3883.22 ; pad.PC40@3735.69,3928.77 3752.09,3883.22
  SIGNAL_2 w5: v1(2499,3642) 2526.14,3642 2569.64,3598.5 3032.92,3598.5 3041.42,3607 3465,3607 ; v1@2499.66,3636.54 2522,3642 v1@2499.66,3647.46 ; v1@2502.89,3638.11 cw(c2512.28,3628.72) 2512.28,3642 cw(c2512.28,3655.28) v1@2502.89,3645.89 ; v1@3474.13,3621.63 cw(c3460.86,3621.63) 3470.24,3612.24 cw(c3479.63,3602.86) v1@3479.63,3616.13 ; v1@3475.26,3624.97 3465,3607 ; v1@3482.97,3617.26 3465,3607 ; 3465,3607 v1(3479.63,3621.63) 3465,3607
LDATA2: pad.PC41 U1.E11 U2.31 U6.5 U10.33 | length 4893.9
  Top Layer w5: U2.31@2453.42,3621.63 v1@2484.63,3621.63 ; U2.31@2469.42,3621.63 ccw(c2469.42,3639.58) v1@2482.11,3626.89 ; U2.31@2473.84,3619.92 cw(c2477.97,3615.79) 2477.97,3621.63 cw(c2477.97,3627.48) U2.31@2473.84,3623.35 ; U2.31@2476.02,3621.63 cw(c2476.02,3613.02) v1@2482.11,3619.11 ; v1@2484.39,3628.26 U2.31@2472.12,3621.63 ; v1@2485.02,3628.41 U2.31@2462.92,3621.63 ; v1@2485.45,3617.53 U2.31@2472.12,3621.63 ; v1@2485.67,3617.51 U2.31@2462.92,3621.63 ; U1.E11@2966.87,2689.77 cw(c2966.87,2676.79) 2976.04,2685.97 cw(c2985.22,2695.14) U1.E11@2972.24,2695.14 ; U1.E11@2971.92,2690.09 ccw(c2983,2701.16) v1@2983,2685.5 ; 2974.31,2687.7 cw(c2966.61,2680) v1@2977.5,2680 ; v1@2978.04,2677.62 U1.E11@2971.12,2698.44 ; v1@2978.77,2676.49 U1.E11@2966.87,2695.14 ; v1@2979.74,2675.57 U1.E11@2963.58,2690.9 ; v1@2985.08,2685.09 U1.E11@2963.58,2690.9 ; v1@2986.24,2684.45 U1.E11@2966.87,2695.14 ; v1@2987.21,2683.54 U1.E11@2971.12,2698.44 ; U10.33@3408.42,3582.26 3501.24,3582.26 v1(3501.5,3582) 3478.5,3582.26 ; U10.33@3427.12,3582.26 3447.05,3582.26 ; U10.33@3428.84,3580.55 cw(c3432.97,3576.42) 3432.97,3582.26 cw(c3432.97,3588.11) U10.33@3428.84,3583.98 ; 3487.58,3582.26 cw(c3487.58,3568.08) v1@3497.61,3578.11 ; 3488.86,3582.26 ccw(c3488.86,3594.64) v1@3497.61,3585.89 ; v1@3500.78,3576.55 3478.5,3582.26 ; v1@3500.91,3587.47 3478.5,3582.26 ; U6.5@3503.84,2747.44 3511,2771.23 ; U6.5@3503.85,2747.49 3511,2770 ; v1@3505.54,2788.34 3511,2766 ; v1@3507.11,2785.11 cw(c3497.72,2775.72) 3511,2775.72 cw(c3524.28,2775.72) v1@3514.89,2785.11 ; U6.5@3511.11,2724.73 U6.5@3511,2724.84 ; v1@3516.46,2788.34 3511,2766 ; U6.5@3518.37,2747.5 3511,2771.23 ; U6.5@3518.36,2747.56 3511,2770 ; U2.31@2462.92,3621.63 v1(2486,3623) ; U2.31@2472.12,3621.63 v1@2484.63,3621.63 ; U2.31@2472.12,3621.63 v1(2486,3623) ; v1@2484.63,3621.63 v1(2486,3623) ; U1.E11@2963.58,2690.9 v1@2982.01,2680 ; U1.E11@2963.58,2690.9 v1(2983,2680) ; U1.E11@2966.87,2695.14 v1@2982.01,2680 ; U1.E11@2966.87,2695.14 v1(2983,2680) ; U1.E11@2971.12,2698.44 v1@2982.01,2680 ; U1.E11@2971.12,2698.44 v1(2983,2680) ; U6.5@3511,2724.84 3511,2770 ; U6.5@3511,2724.84 v1(3511,2789) 3511,2766 ; 3511,2770 3511.11,2746.39 3511,2771.23 ; U6.5@3505.92,2751.58 ccw(c3493.65,2763.85) 3511,2763.85 cw(c3493.65,2763.85) U6.5@3505.92,2751.58 ; 3511,2764.38 ccw(c3529.1,2764.38) 3516.3,2751.58 cw(c3529.1,2764.38) 3511,2764.38
  SIGNAL_1 w5: v1@2979.6,2675.68 2999.5,2663.5 ; v1@2983,2674.5 cw(c2983,2661.22) 2992.39,2670.61 cw(c3001.78,2680) v1@2988.5,2680 ; v1(2983,2680) 2999.5,2663.5 ; v1@2987.32,2683.4 2999.5,2663.5 ; v1(3501.5,3582) 3511,3572.5 v1(3511,2789) 3511,2737 3425,2651 3162.22,2651 3149.72,2663.5 2999.5,2663.5 ; v1@3505.54,2788.34 3511,2766 v1@3516.46,2788.34 ; v1@3505.54,2789.66 3511,2812 v1@3516.46,2789.66 ; v1@3507.11,2785.11 cw(c3497.72,2775.72) 3511,2775.72 cw(c3524.28,2775.72) v1@3514.89,2785.11 ; v1@3507.11,2792.89 ccw(c3497.72,2802.28) 3511,2802.28 ccw(c3524.28,2802.28) v1@3514.89,2792.89 ; 3513.5,3570 3609.72,3570 3796.6,3756.88 pad.PC41@3796.6,3838.71 3796.6,3800.09 ; pad.PC41@3776.28,3832.93 3796.6,3800.09 ; pad.PC41@3780.83,3835.34 3796.6,3800.09 ; pad.PC41@3781.66,3823.77 cw(c3745.61,3787.72) 3796.6,3787.72 cw(c3847.59,3787.72) pad.PC41@3811.53,3823.77 ; pad.PC41@3785.2,3827.31 cw(c3757.68,3799.79) 3796.6,3799.79 cw(c3835.52,3799.79) pad.PC41@3808,3827.31 ; pad.PC41@3785.59,3837.11 3796.6,3800.09 ; pad.PC41@3788.73,3830.84 cw(c3769.75,3811.86) 3796.6,3811.86 cw(c3823.45,3811.86) pad.PC41@3804.46,3830.84 ; pad.PC41@3790.5,3838.22 3796.6,3800.09 ; pad.PC41@3802.7,3838.22 3796.6,3800.09 ; pad.PC41@3807.6,3837.11 3796.6,3800.09 ; pad.PC41@3812.36,3835.34 3796.6,3800.09 ; pad.PC41@3816.91,3832.93 3796.6,3800.09
  SIGNAL_2 w5: v1(2486,3623) 2531,3623 2565.5,3588.5 3037.06,3588.5 3045.56,3597 3486.5,3597 ; v1@2486.66,3617.54 2509,3623 v1@2486.66,3628.46 ; v1@2489.89,3619.11 cw(c2499.28,3609.72) 2499.28,3623 cw(c2499.28,3636.28) v1@2489.89,3626.89 ; v1@3496,3582 ccw(c3482.72,3582) 3492.11,3591.39 ccw(c3501.5,3600.78) v1@3501.5,3587.5 ; v1@3497.14,3578.65 3486.5,3597 ; v1@3504.85,3586.36 3486.5,3597 ; 3486.5,3597 v1(3501.5,3582) 3486.5,3597
LDATA3: pad.PC42 U1.A13 U2.32 U6.7 U10.35 | length 4852.2
  Top Layer w5: U2.32@2453.42,3601.95 v1(2501.55,3601.95) U2.32@2475.54,3601.95 ; U2.32@2472.12,3601.95 2492.05,3601.95 ; U2.32@2473.84,3600.24 cw(c2477.97,3596.1) 2477.97,3601.95 cw(c2477.97,3607.79) U2.32@2473.84,3603.66 ; v1@2497.66,3598.06 ccw(c2488.27,3588.67) 2488.27,3601.95 ccw(c2488.27,3615.23) v1@2497.66,3605.84 ; v1@2500.89,3596.49 2478.55,3601.95 v1@2500.89,3607.41 ; v1@2500.97,3596.48 U2.32@2475.54,3601.95 ; v1@2500.97,3607.42 U2.32@2475.54,3601.95 ; U1.A13@3092.85,2632.15 3095.5,2629.5 3129.5,2629.5 v1(3132,2632) ; 3112.69,2629.5 ccw(c3112.69,2651.31) v1@3128.11,2635.89 ; U10.35@3408.42,3542.89 3535.39,3542.89 v1(3543,3550.5) ; U10.35@3427.12,3542.89 3447.05,3542.89 ; U10.35@3428.84,3541.18 cw(c3432.97,3537.05) 3432.97,3542.89 cw(c3432.97,3548.74) U10.35@3428.84,3544.61 ; U6.7@3566.84,2747.47 v1@3574.1,2771.23 ; v1@3568.57,2772.9 U6.7@3567.49,2749.59 ; U6.7@3568.91,2751.58 ccw(c3556.38,2764.11) 3574.1,2764.11 ccw(c3591.83,2764.11) U6.7@3579.29,2751.58 ; v1@3568.95,2769.81 U6.7@3580.7,2749.63 ; v1@3570.11,2768.11 cw(c3560.48,2758.48) 3574.1,2758.48 ; U6.7@3574.1,2746.39 v1@3574.1,2771.23 ; 3574.1,2758.97 cw(c3587.03,2758.97) v1@3577.89,2768.11 ; v1@3574.1,2771.9 U6.7@3574.1,2724.73 U6.7@3575,2725.63 ; v1@3579.06,2769.85 U6.7@3567.49,2749.59 ; v1@3579.42,2772.95 U6.7@3580.7,2749.63 ; U6.7@3581.36,2747.47 v1@3574.1,2771.23 ; U6.7@3567.49,2749.59 v1(3574,2772) ; v1(3574,2772) U6.7@3574.1,2749 ; v1(3574,2772) U6.7@3580.7,2749.63 ; v1(3574,2772) U6.7@3574.1,2749 ; U6.7@3574.1,2749 3579.46,2771.37 U6.7@3574.1,2749 ; U6.7@3574.1,2749 3568.54,2771.32 U6.7@3574.1,2749
  SIGNAL_1 w5: v1(3132,2632) 3474,2632 3574,2732 v1(3574,2772) 3574,2857.5 3531.5,2900 3531.5,3539 v1(3543,3550.5) 3604.36,3550.5 3838,3784.14 3838,3876.05 pad.PC42@3796.6,3917.45 ; v1@3132.66,2626.54 3155,2632 v1@3132.66,2637.46 ; v1@3135.89,2628.11 cw(c3145.28,2618.72) 3145.28,2632 cw(c3145.28,2645.28) v1@3135.89,2635.89 ; v1@3543.66,3545.04 3566,3550.5 v1@3543.66,3555.96 ; v1@3546.89,3546.61 cw(c3556.28,3537.22) 3556.28,3550.5 cw(c3556.28,3563.78) v1@3546.89,3554.39 ; v1@3568.54,2771.34 3574,2749 v1@3579.46,2771.34 ; v1@3568.54,2772.66 3574,2795 v1@3579.46,2772.66 ; v1@3570.11,2768.11 cw(c3560.72,2758.72) 3574,2758.72 cw(c3587.28,2758.72) v1@3577.89,2768.11 ; v1@3570.11,2775.89 ccw(c3560.72,2785.28) 3574,2785.28 ccw(c3587.28,2785.28) v1@3577.89,2775.89 ; pad.PC42@3785.28,3899.61 3830.83,3883.22 ; pad.PC42@3787.26,3904.31 3830.83,3883.22 ; pad.PC42@3789.69,3908.73 3830.83,3883.22 ; pad.PC42@3792.55,3912.85 3830.83,3883.22 ; pad.PC42@3796.6,3896.33 cw(c3796.6,3845.33) 3832.66,3881.39 cw(c3868.71,3917.45) pad.PC42@3817.72,3917.45 ; pad.PC42@3796.6,3901.33 cw(c3796.6,3862.4) 3824.12,3889.93 cw(c3851.64,3917.45) pad.PC42@3812.72,3917.45 ; pad.PC42@3796.6,3906.33 cw(c3796.6,3879.48) 3815.58,3898.46 cw(c3834.57,3917.45) pad.PC42@3807.72,3917.45 ; pad.PC42@3801.19,3921.49 3830.83,3883.22 ; pad.PC42@3805.31,3924.36 3830.83,3883.22 ; pad.PC42@3809.74,3926.79 3830.83,3883.22 ; pad.PC42@3814.43,3928.77 3830.83,3883.22
  SIGNAL_2 w5: v1@2498.09,3597.67 2520.16,3583.34 v1@2505.83,3605.41 ; v1@2501.55,3596.45 cw(c2501.55,3583.17) 2510.94,3592.56 cw(c2520.33,3601.95) v1@2507.05,3601.95 ; v1(2501.55,3601.95) 2545.5,3558 2701.82,3558 2703.82,3556 v1@3537.5,3556 ; 3516.44,3556 cw(c3516.44,3523.94) v1@3539.11,3546.61 ; 3528.51,3556 cw(c3528.51,3536.01) v1@3542.65,3550.15 ; v1@3541.34,3545.26 3516.51,3556 ; v1(3543,3550.5) 3516.51,3556 ; v1@3543.56,3555.97 3516.51,3556
LDATA4: pad.PC43 U1.F10 U2.41 U6.8 U10.38 | length 5327.3
  Top Layer w5: U2.41@2453.42,3424.78 2454.21,3424 v1(2499,3424) ; U2.41@2472.12,3424.78 v1@2492.05,3424 ; U2.41@2473.84,3426.5 ccw(c2479.86,3432.52) 2479.86,3424 ; v1@2495.11,3420.11 ccw(c2485.72,3410.72) 2485.72,3424 ccw(c2485.72,3437.28) v1@2495.11,3427.89 ; v1@2498.19,3418.56 U2.41@2475.99,3424.63 ; v1@2498.34,3418.54 U2.41@2476,3424 ; v1@2498.34,3429.46 U2.41@2476,3424 ; v1@2498.49,3429.48 U2.41@2475.99,3424.63 ; U1.F10@2935.37,2732.01 ccw(c2935.37,2746.79) 2945.82,2736.34 ; U1.F10@2937,2728 2936.74,2728 U1.F10@2935.37,2726.64 ; U1.F10@2940.75,2726.64 cw(c2951.92,2726.64) 2944.02,2734.54 ; 2942.08,2732.59 cw(c2951.51,2723.16) v1@2951.51,2736.5 ; 2942.14,2732.65 ccw(c2932.79,2742) v1@2946.01,2742 ; v1@2946.54,2744.36 U1.F10@2939.52,2723.22 ; v1@2947.16,2745.37 U1.F10@2936.12,2726.64 ; v1@2947.25,2745.48 U1.F10@2935.37,2726.64 ; v1@2948.21,2746.4 U1.F10@2932.16,2730.95 ; v1@2953.63,2736.92 U1.F10@2932.16,2730.95 ; v1@2954.78,2737.58 U1.F10@2935.37,2726.64 ; v1@2954.87,2737.65 U1.F10@2936.12,2726.64 ; v1@2955.74,2738.49 U1.F10@2939.52,2723.22 ; U10.38@3408.42,3483.84 v1@3542.16,3483.84 ; U10.38@3427.12,3483.84 3447.05,3483.84 ; U10.38@3428.84,3482.13 cw(c3432.97,3477.99) 3432.97,3483.84 cw(c3432.97,3489.68) U10.38@3428.84,3485.55 ; 3522.04,3483.84 cw(c3522.04,3454.04) v1@3543.11,3475.11 ; 3534.11,3483.84 cw(c3534.11,3466.11) v1@3546.65,3478.65 ; v1@3545.4,3473.74 3521.61,3483.84 ; v1(3547,3479) 3521.61,3483.84 ; v1@3547.45,3484.48 3521.61,3483.84 ; U6.8@3598.34,2747.47 v1@3605.6,2771.23 ; v1@3600.08,2772.44 U6.8@3598.84,2749.12 ; U6.8@3600.41,2751.58 ccw(c3587.87,2764.11) 3605.6,2764.11 ccw(c3623.32,2764.11) U6.8@3610.79,2751.58 ; v1@3600.47,2769.28 U6.8@3612.34,2749.16 ; v1@3601.61,2767.61 cw(c3591.99,2757.99) 3605.6,2757.99 ; U6.8@3605.6,2746.39 v1@3605.6,2771.23 ; 3605.6,2758.46 cw(c3618.54,2758.46) v1@3609.39,2767.61 ; U6.8@3606,2725.13 U6.8@3605.6,2724.73 3605.6,2771.4 v1(3605.5,2771.5) ; v1@3610.55,2769.32 U6.8@3598.84,2749.12 ; v1@3610.91,2772.48 U6.8@3612.34,2749.16 ; U6.8@3612.86,2747.47 v1@3605.6,2771.23 ; U2.41@2476,3424 v1(2499,3424) ; U2.41@2475.99,3424.63 v1(2499,3424) ; U1.F10@2932.16,2730.95 v1(2951.51,2742) ; U1.F10@2932.16,2730.95 v1(2951.51,2742) ; U1.F10@2935.37,2726.64 U1.F10@2936.12,2726.64 ; U1.F10@2935.37,2726.64 v1(2951.51,2742) ; U1.F10@2935.37,2726.64 v1(2951.51,2742) ; U1.F10@2936.12,2726.64 v1(2951.51,2742) ; U1.F10@2936.12,2726.64 v1(2951.51,2742) ; U1.F10@2939.52,2723.22 v1(2951.51,2742) ; U1.F10@2939.52,2723.22 v1(2951.51,2742) ; U6.8@3598.84,2749.12 v1(3605.5,2771.5) ; v1(3605.5,2771.5) U6.8@3605.6,2748.5 ; v1(3605.5,2771.5) U6.8@3612.34,2749.16 ; v1(3605.5,2771.5) U6.8@3605.6,2748.5 ; U6.8@3605.6,2748.5 3610.96,2770.87 U6.8@3605.6,2748.5 ; U6.8@3605.6,2748.5 3600.04,2770.82 U6.8@3605.6,2748.5
  SIGNAL_1 w5: v1@2948.12,2746.33 2967.52,2758.01 ; v1(2951.51,2742) 2967.52,2758.01 ; v1@2951.51,2747.5 ccw(c2951.51,2760.78) 2960.9,2751.39 ccw(c2970.29,2742) v1@2957.01,2742 ; v1@2955.84,2738.61 2967.52,2758.01 ; 3330.7,2758.01 cw(c3330.7,2744.7) v1@3340.11,2754.11 ; 3330.74,2758.01 ccw(c3330.74,2771.26) v1@3340.11,2761.89 ; v1@3343.34,2752.54 3321,2758.01 ; v1@3343.34,2763.46 3321,2758.01 ; v1@3541.54,3478.34 3547,3456 v1@3552.46,3478.34 ; v1@3543.11,3475.11 cw(c3533.72,3465.72) 3547,3465.72 cw(c3560.28,3465.72) v1@3550.89,3475.11 ; v1@3543.54,3483.27 3565.61,3497.61 v1@3551.27,3475.54 ; v1@3547,3484.5 ccw(c3547,3497.78) 3556.39,3488.39 ccw(c3565.78,3479) v1@3552.5,3479 ; v1@3600.04,2772.16 3605.5,2794.5 v1@3610.96,2772.16 ; v1@3601.61,2775.39 ccw(c3592.22,2784.78) 3605.5,2784.78 ccw(c3618.78,2784.78) v1@3609.39,2775.39 ; v1(3605.5,2771.5) 3605.5,2847.5 3547,2906 v1(3547,3479) 3875.34,3807.34 ; pad.PC43@3855.45,3831.6 3875.34,3807.34 ; pad.PC43@3859.76,3834.57 3875.34,3807.34 ; pad.PC43@3864.39,3836.74 3875.34,3807.34 ; pad.PC43@3867.39,3819.14 cw(c3862.61,3807.34) 3875.34,3807.34 ; pad.PC43@3869.27,3823.77 cw(c3865.62,3814.76) 3875.34,3814.76 cw(c3885.06,3814.76) pad.PC43@3881.4,3823.77 ; pad.PC43@3869.25,3838.11 3875.34,3807.34 ; pad.PC43@3881.43,3838.11 3875.34,3807.34 ; pad.PC43@3883.28,3819.14 ccw(c3888.07,3807.34) 3875.34,3807.34 ; pad.PC43@3886.28,3836.74 3875.34,3807.34 ; pad.PC43@3890.92,3834.57 3875.34,3807.34 ; pad.PC43@3895.23,3831.6 3875.34,3807.34 ; 2967.52,2758.01 v1(3344,2758) 3321,2758.01 ; 3875.34,3807.34 pad.PC43@3875.34,3838.71 3875.34,3807.34
  SIGNAL_2 w5: v1(2499,3424) 2857.22,3424 2912.22,3479 v1(3547,3479) ; v1@2499.66,3418.54 2522,3424 v1@2499.66,3429.46 ; v1@2502.89,3420.11 cw(c2512.28,3410.72) 2512.28,3424 cw(c2512.28,3437.28) v1@2502.89,3427.89 ; v1@3543.11,3475.11 ccw(c3533.72,3465.72) 3533.72,3479 ccw(c3533.72,3492.28) v1@3543.11,3482.89 ; v1@3546.34,3473.54 3524,3479 v1@3546.34,3484.46
  Bottom Layer w5: v1(3344,2758) 3367.16,2756.5 ; v1@3344.3,2752.51 3367.16,2756.5 ; v1@3345,2763.41 3367.16,2756.5 ; v1@3345.5,2756.5 3590.5,2756.5 ; v1@3347.89,2754.11 cw(c3353.66,2748.34) 3353.66,2756.5 ; v1@3347.89,2761.89 ccw(c3360.9,2774.9) 3360.9,2756.5 ; v1@3600,2771.5 cw(c3586.72,2771.5) 3596.11,2762.11 cw(c3605.5,2752.72) v1@3605.5,2766 ; v1@3601.14,2774.85 3590.5,2756.5 ; v1@3608.85,2767.14 3590.5,2756.5 ; 3590.5,2756.5 v1(3605.5,2771.5) 3590.5,2756.5
LDATA5: pad.PC44 U1.F11 U2.42 U6.10 U10.40 | length 5820.2
  Top Layer w5: 2477.73,3405 ccw(c2477.73,3399.49) 2473.84,3403.39 cw(c2477.97,3399.25) 2477.97,3405.1 cw(c2477.97,3410.94) 2473.84,3406.81 ccw(c2478.21,3411.18) 2478.21,3405 ; 2492.05,3405 2472.12,3405.1 2490.6,3405.1 U2.42@2453.42,3405.1 2453.52,3405 v1(2514,3405) 2491,3405 ; v1@2510.11,3401.11 ccw(c2500.72,3391.72) 2500.72,3405 ccw(c2500.72,3418.28) v1@2510.11,3408.89 ; v1@2513.34,3399.54 2491,3405 ; v1@2513.34,3410.46 2491,3405 ; U1.F11@2935.37,2700.52 ccw(c2935.37,2711.72) 2943.3,2703.8 ; U1.F11@2940.75,2695.14 cw(c2955.49,2695.14) v1@2945.07,2705.57 ; v1@2945,2711 cw(c2931.72,2711) 2941.11,2701.61 cw(c2950.5,2692.22) v1@2950.5,2705.5 ; v1@2945.41,2713.09 U1.F11@2939.69,2691.94 ; v1@2946.08,2714.27 U1.F11@2935.37,2695.14 ; v1@2946.14,2714.36 U1.F11@2935.37,2695.87 ; v1@2947,2715.25 U1.F11@2931.97,2699.3 ; v1@2950.5,2710.27 v1(2950.5,2711) ; v1@2952.83,2706.02 U1.F11@2931.97,2699.3 ; v1@2953.86,2706.64 U1.F11@2935.37,2695.87 ; v1@2953.97,2706.73 U1.F11@2935.37,2695.14 ; v1@2954.91,2707.71 U1.F11@2939.69,2691.94 ; U10.40@3410.89,3442 U10.40@3408.42,3444.47 v1(3584.5,3444.47) 3622.45,3444.47 3680.5,3386.42 3680.5,3295.5 v1(3635.5,3250.5) ; U10.40@3427.12,3444.47 3447.05,3444.47 ; U10.40@3428.84,3442.76 cw(c3432.97,3438.62) 3432.97,3444.47 cw(c3432.97,3450.31) U10.40@3428.84,3446.18 ; v1@3580.61,3440.58 ccw(c3571.22,3431.19) 3571.22,3444.47 ccw(c3571.22,3457.75) v1@3580.61,3448.36 ; v1@3583.84,3439.01 3561.5,3444.47 v1@3583.84,3449.93 ; v1@3585.16,3439.01 3607.5,3444.47 v1@3585.16,3449.93 ; v1@3588.39,3440.58 cw(c3597.78,3431.19) 3597.78,3444.47 cw(c3597.78,3457.75) v1@3588.39,3448.36 ; v1@3632.04,3254.77 3654.11,3269.11 v1@3639.77,3247.04 ; v1@3635.5,3256 ccw(c3635.5,3269.28) 3644.89,3259.89 ccw(c3654.28,3250.5) v1@3641,3250.5 ; v1@3660.51,2773.29 U6.10@3662.04,2749.9 ; v1@3660.61,2771.89 U6.10@3668,2749.77 ; v1@3660.64,2771.76 U6.10@3668.51,2749.88 ; v1@3661.16,2770.4 U6.10@3674.7,2750.99 ; U6.10@3661.31,2747.31 v1@3668,2771 ; v1@3662.11,2769.11 cw(c3647.89,2754.89) U6.10@3668,2754.89 ; U6.10@3663.4,2751.58 ccw(c3652.29,2762.69) 3668,2762.69 ; 3668,2764.55 cw(c3674.45,2764.55) v1@3669.89,2769.11 ; v1@3668,2765.54 ccw(c3687.74,2765.54) U6.10@3673.78,2751.58 ; U6.10@3668.59,2724.73 3668,2725.32 v1@3668,2771 ; U6.10@3668.59,2746.39 v1@3668,2771 ; v1@3671.27,2771.44 U6.10@3662.04,2749.9 ; v1@3671.31,2774.41 U6.10@3674.7,2750.99 ; v1@3671.5,2772.82 U6.10@3668,2749.77 ; v1@3671.5,2772.94 U6.10@3668.51,2749.88 ; U6.10@3675.82,2747.65 v1@3668,2771 ; U1.F11@2931.97,2699.3 v1(2950.5,2711) ; U1.F11@2931.97,2699.3 v1(2950.5,2711) ; U1.F11@2935.37,2695.14 U1.F11@2935.37,2695.87 ; U1.F11@2935.37,2695.14 v1(2950.5,2711) ; U1.F11@2935.37,2695.14 v1(2950.5,2711) ; U1.F11@2935.37,2695.87 v1(2950.5,2711) ; U1.F11@2935.37,2695.87 v1(2950.5,2711) ; U1.F11@2939.69,2691.94 v1(2950.5,2711) ; U1.F11@2939.69,2691.94 v1(2950.5,2711) ; U6.10@3662.04,2749.9 v1(3666,2773) ; v1(3666,2773) v1@3668,2771 ; v1(3666,2773) U6.10@3668,2749.77 ; v1(3666,2773) U6.10@3674.7,2750.99 ; v1(3666,2773) U6.10@3668.51,2749.88
  SIGNAL_1 w5: v1@3579.04,3445.13 3584.5,3467.47 v1@3589.96,3445.13 ; v1@3580.61,3448.36 ccw(c3571.22,3457.75) 3584.5,3457.75 ccw(c3597.78,3457.75) v1@3588.39,3448.36 ; v1(3584.5,3444.47) 3584.5,3484.86 3913,3813.36 3913,3879.79 pad.PC44@3875.34,3917.45 ; v1@3632.04,3246.23 3654.11,3231.89 v1@3639.77,3253.96 ; v1@3635.5,3245 cw(c3635.5,3231.72) 3644.89,3241.11 cw(c3654.28,3250.5) v1@3641,3250.5 ; v1(3635.5,3250.5) 3666,3220 v1(3666,2773) ; v1@3660.54,2773.66 3666,2796 v1@3671.46,2773.66 ; v1@3662.11,2776.89 ccw(c3652.72,2786.28) 3666,2786.28 ccw(c3679.28,2786.28) v1@3669.89,2776.89 ; pad.PC44@3864.02,3899.61 3909.57,3883.22 ; pad.PC44@3866,3904.31 3909.57,3883.22 ; pad.PC44@3868.43,3908.73 3909.57,3883.22 ; pad.PC44@3871.29,3912.85 3909.57,3883.22 ; pad.PC44@3875.34,3896.33 cw(c3875.34,3845.33) 3911.4,3881.39 cw(c3947.45,3917.45) pad.PC44@3896.46,3917.45 ; pad.PC44@3875.34,3901.33 cw(c3875.34,3862.4) 3902.86,3889.93 cw(c3930.38,3917.45) pad.PC44@3891.46,3917.45 ; pad.PC44@3875.34,3906.33 cw(c3875.34,3879.48) 3894.32,3898.46 cw(c3913.31,3917.45) pad.PC44@3886.46,3917.45 ; pad.PC44@3879.93,3921.49 3909.57,3883.22 ; pad.PC44@3884.05,3924.36 3909.57,3883.22 ; pad.PC44@3888.48,3926.79 3909.57,3883.22 ; pad.PC44@3893.17,3928.77 3909.57,3883.22
  SIGNAL_2 w5: v1(2514,3405) 2852.36,3405 2861.86,3414.5 3554.53,3414.5 v1(3584.5,3444.47) ; v1@2514.66,3399.54 2537,3405 v1@2514.66,3410.46 ; v1@2517.89,3401.11 cw(c2527.28,3391.72) 2527.28,3405 cw(c2527.28,3418.28) v1@2517.89,3408.89 ; v1@3579,3444.47 cw(c3565.72,3444.47) 3575.11,3435.08 cw(c3584.5,3425.69) v1@3584.5,3438.97 ; v1@3580.23,3447.93 3565.89,3425.86 v1@3587.96,3440.19
  Bottom Layer w5: v1@2947.13,2715.35 2966,2726.5 ; v1(2950.5,2711) 2966,2726.5 ; v1@2950.5,2716.5 ccw(c2950.5,2729.78) 2959.89,2720.39 ccw(c2969.28,2711) v1@2956,2711 ; v1@2954.85,2707.63 2966,2726.5 ; 3344.5,2717 3348.5,2717 ; v1@3660.5,2773 cw(c3647.22,2773) 3656.61,2763.61 cw(c3666,2754.22) v1@3666,2767.5 ; v1@3661.73,2776.46 3647.39,2754.39 ; v1@3669.46,2768.73 3647.39,2754.39 ; 2966,2726.5 3105.08,2726.5 3109.58,2731 3308.22,2731 3322.22,2717 3348.5,2717 ; 3348.5,2717 3610,2717 v1(3666,2773) 3647.39,2754.39
LDATA6: pad.PC45 U1.C13 U2.43 U6.11 U10.42 | length 4797.4
  Top Layer w5: U2.43@2453.42,3385.41 2491.41,3385.41 U2.43@2472.12,3385.41 ; U2.43@2473.84,3383.7 cw(c2477.97,3379.57) 2477.97,3385.41 cw(c2477.97,3391.26) U2.43@2473.84,3387.13 ; U2.43@2475.89,3385.41 ccw(c2475.89,3404.11) v1@2489.11,3390.89 ; 2483.55,3385.41 cw(c2483.55,3377.55) v1@2489.11,3383.11 ; v1@2491.87,3392.38 U2.43@2472.12,3385.41 ; v1@2491.98,3392.4 U2.43@2469.88,3385.41 ; v1@3010.16,2644.13 U1.C13@3025.62,2628.85 ; v1@3012.29,2642.48 U1.C13@3033.16,2636.39 ; v1@3014.49,2642.02 cw(c3014.49,2628.75) 3023.88,2638.13 cw(c3033.27,2647.52) v1@3019.99,2647.52 ; v1@3017.88,2651.85 U1.C13@3033.16,2636.39 ; v1@3019.53,2649.72 U1.C13@3025.62,2628.85 ; U1.C13@3024.49,2632.15 ccw(c3011.51,2632.15) 3020.69,2641.32 ccw(c3029.86,2650.5) U1.C13@3029.86,2637.52 ; U10.42@3408.83,3405.5 U10.42@3408.42,3405.1 3603.9,3405.1 v1(3604,3405) 3581,3405.1 ; U10.42@3427.12,3405.1 3447.05,3405.1 ; U10.42@3428.84,3403.39 cw(c3432.97,3399.25) 3432.97,3405.1 cw(c3432.97,3410.94) U10.42@3428.84,3406.81 ; 3590.49,3405.1 cw(c3590.49,3391.49) v1@3600.11,3401.11 ; 3590.96,3405.1 ccw(c3590.96,3418.04) v1@3600.11,3408.89 ; v1@3603.32,3399.54 3581,3405.1 ; v1@3603.37,3410.46 3581,3405.1 ; U6.11@3692.83,2747.47 3700.09,2771.23 ; v1@3694.63,2783.04 3700.09,2760.7 ; U6.11@3694.9,2751.58 ccw(c3682.36,2764.11) 3700.09,2764.11 ccw(c3717.81,2764.11) U6.11@3705.28,2751.58 ; v1@3696.2,2779.81 cw(c3686.81,2770.42) 3700.09,2770.42 cw(c3713.37,2770.42) v1@3703.98,2779.81 ; U6.11@3700.09,2724.73 v1(3700.09,2783.7) 3700.09,2760.7 ; U6.11@3700.09,2746.39 3700.09,2771.23 ; v1@3705.55,2783.04 3700.09,2760.7 ; U6.11@3707.35,2747.47 3700.09,2771.23 ; U2.43@2469.88,3385.41 2492.72,3381.51 U2.43@2472.12,3385.41 ; U2.43@2469.88,3385.41 v1(2493,3387) U2.43@2472.12,3385.41 ; v1(3014.49,2647.52) U1.C13@3029.86,2632.15 ; v1(3014.49,2647.52) U1.C13@3025.62,2628.85 ; v1(3014.49,2647.52) U1.C13@3033.16,2636.39 ; v1(3014.49,2647.52) U1.C13@3029.86,2632.15 ; U1.C13@3029.86,2632.15 3018.84,2650.89 U1.C13@3029.86,2632.15 ; U1.C13@3029.86,2632.15 3011.12,2643.17 U1.C13@3029.86,2632.15
  SIGNAL_1 w5: v1@3011.03,2643.25 3033.09,2628.92 v1@3018.76,2650.99 ; v1@3014.49,2642.02 cw(c3014.49,2628.75) 3023.88,2638.13 cw(c3033.27,2647.52) v1@3019.99,2647.52 ; v1(3014.49,2647.52) 3046.51,2615.5 3603.14,2615.5 3700.09,2712.45 v1(3700.09,2783.7) ; v1@3598.54,3404.34 3604,3382 ; v1@3598.55,3405.78 3604.5,3428.01 ; v1@3600.11,3401.11 cw(c3590.72,3391.72) 3604,3391.72 cw(c3617.28,3391.72) v1@3607.89,3401.11 ; v1@3600.11,3408.89 ccw(c3589.51,3419.49) 3604.5,3419.49 ; v1@3604.5,3405 3604.5,3404.44 v1@3604,3404.94 ; 3604.5,3417.07 ccw(c3616.07,3417.07) v1@3607.89,3408.89 ; v1@3609.46,3404.34 3604,3382 ; v1@3609.47,3405.54 3604.5,3428.01 ; v1@3694.63,2783.04 3700.09,2760.7 ; v1@3696.2,2779.81 cw(c3686.81,2770.42) 3700.09,2770.42 cw(c3713.37,2770.42) v1@3703.98,2779.81 ; v1@3696.2,2787.59 ccw(c3686.81,2796.98) 3700.09,2796.98 ccw(c3713.37,2796.98) v1@3703.98,2787.59 ; v1@3705.55,2783.04 3700.09,2760.7 ; pad.PC45@3941.5,3826.13 pad.PC45@3954.08,3838.71 3952.49,3838.71 3604.5,3490.72 3604.5,3405.5 v1(3604,3405) ; 3604,3382 v1(3604,3405) ; v1@3604,3404.94 v1(3604,3405) ; v1@3604,3404.94 3604,3308 3700.09,3211.91 v1(3700.09,2783.7) ; v1(3604,3405) 3604.5,3428.01 ; 3700.09,2760.7 v1(3700.09,2783.7)
  SIGNAL_2 w5: v1(2493,3387) 2848.5,3387 2866,3404.5 3603.5,3404.5 v1(3604,3405) 3580.98,3404.5 ; v1@2493.66,3381.54 2516,3387 v1@2493.66,3392.46 ; v1@2496.89,3383.11 cw(c2506.28,3373.72) 2506.28,3387 cw(c2506.28,3400.28) v1@2496.89,3390.89 ; 3589.51,3404.5 ccw(c3589.51,3419.49) v1@3600.11,3408.89 ; 3591.93,3404.5 cw(c3591.93,3392.93) v1@3600.11,3401.11 ; v1@3603.22,3410.45 3580.98,3404.5 ; v1@3603.46,3399.53 3580.98,3404.5